# EAGLE board steering_wheel_V2 (EAGLE 6.3)
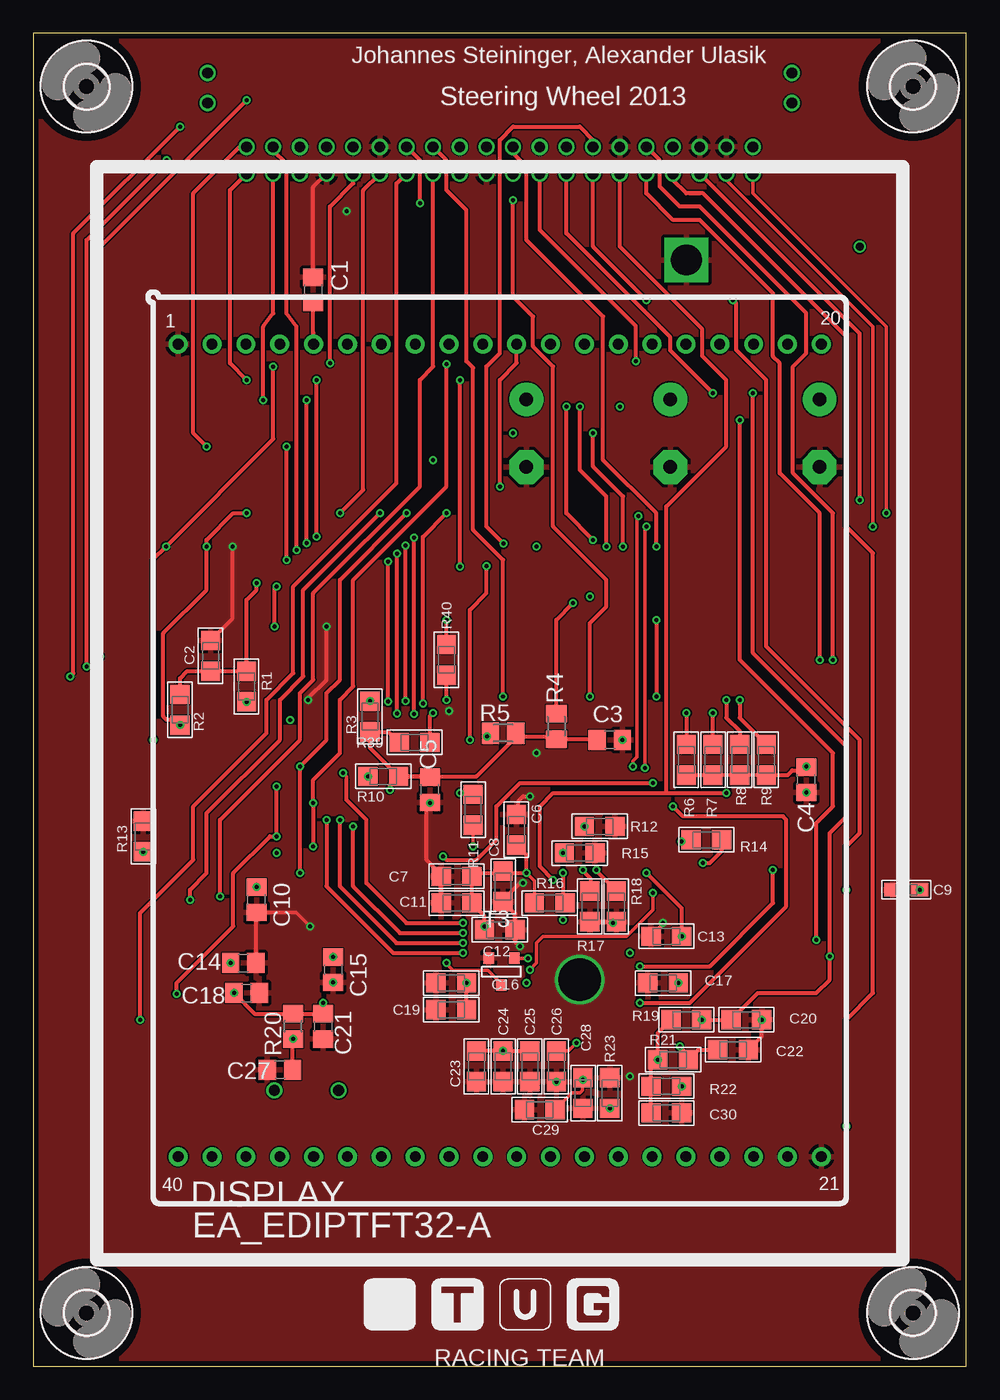
[diagram p0: board, top side]
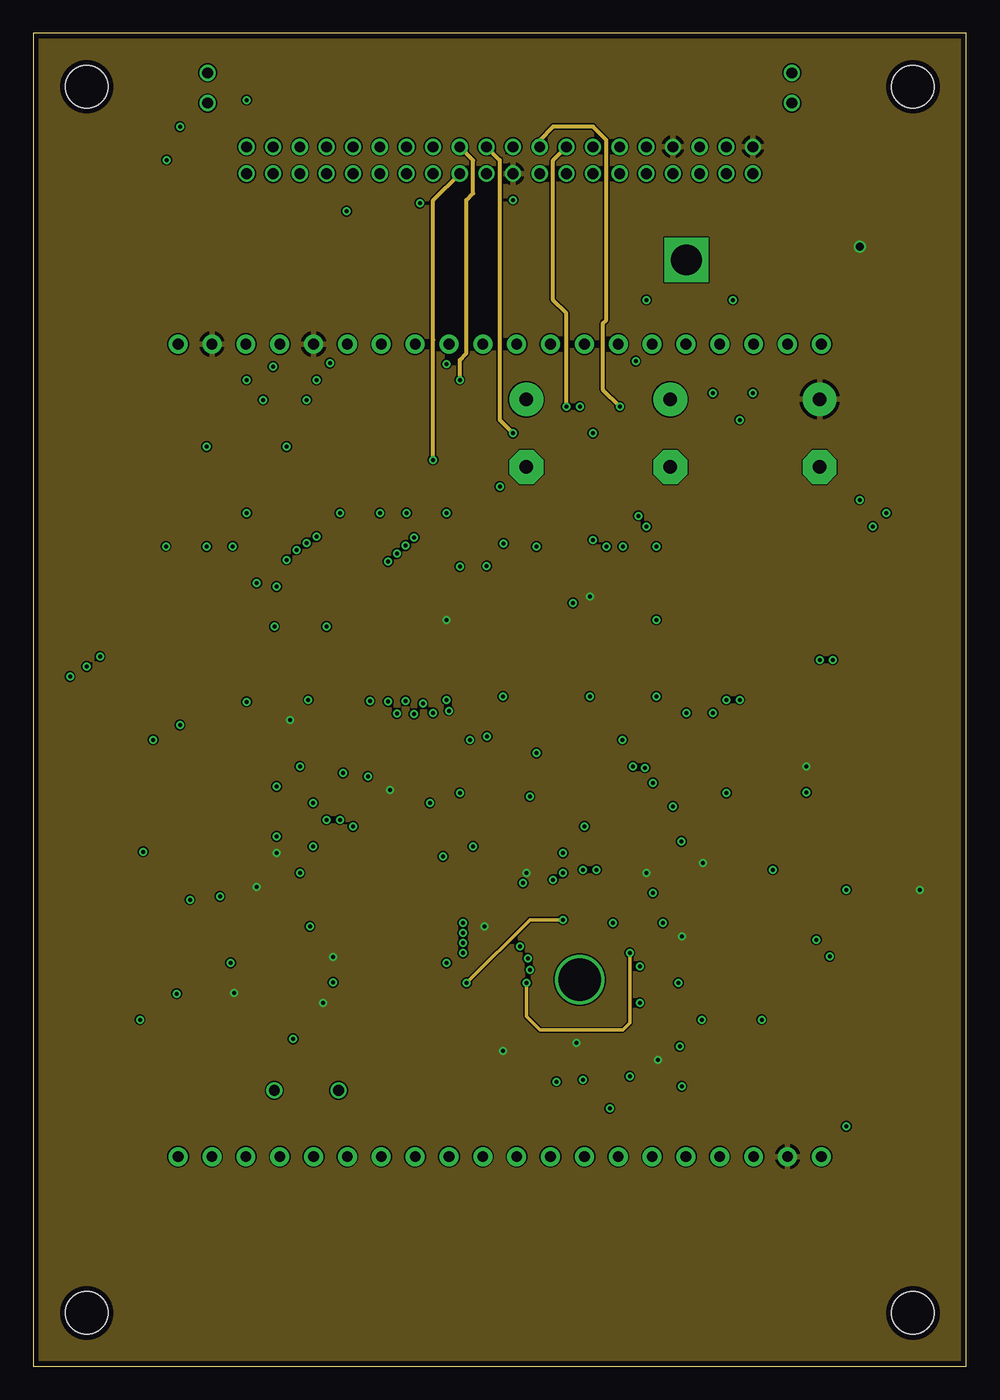
[diagram p1: board, inner layer Route2]
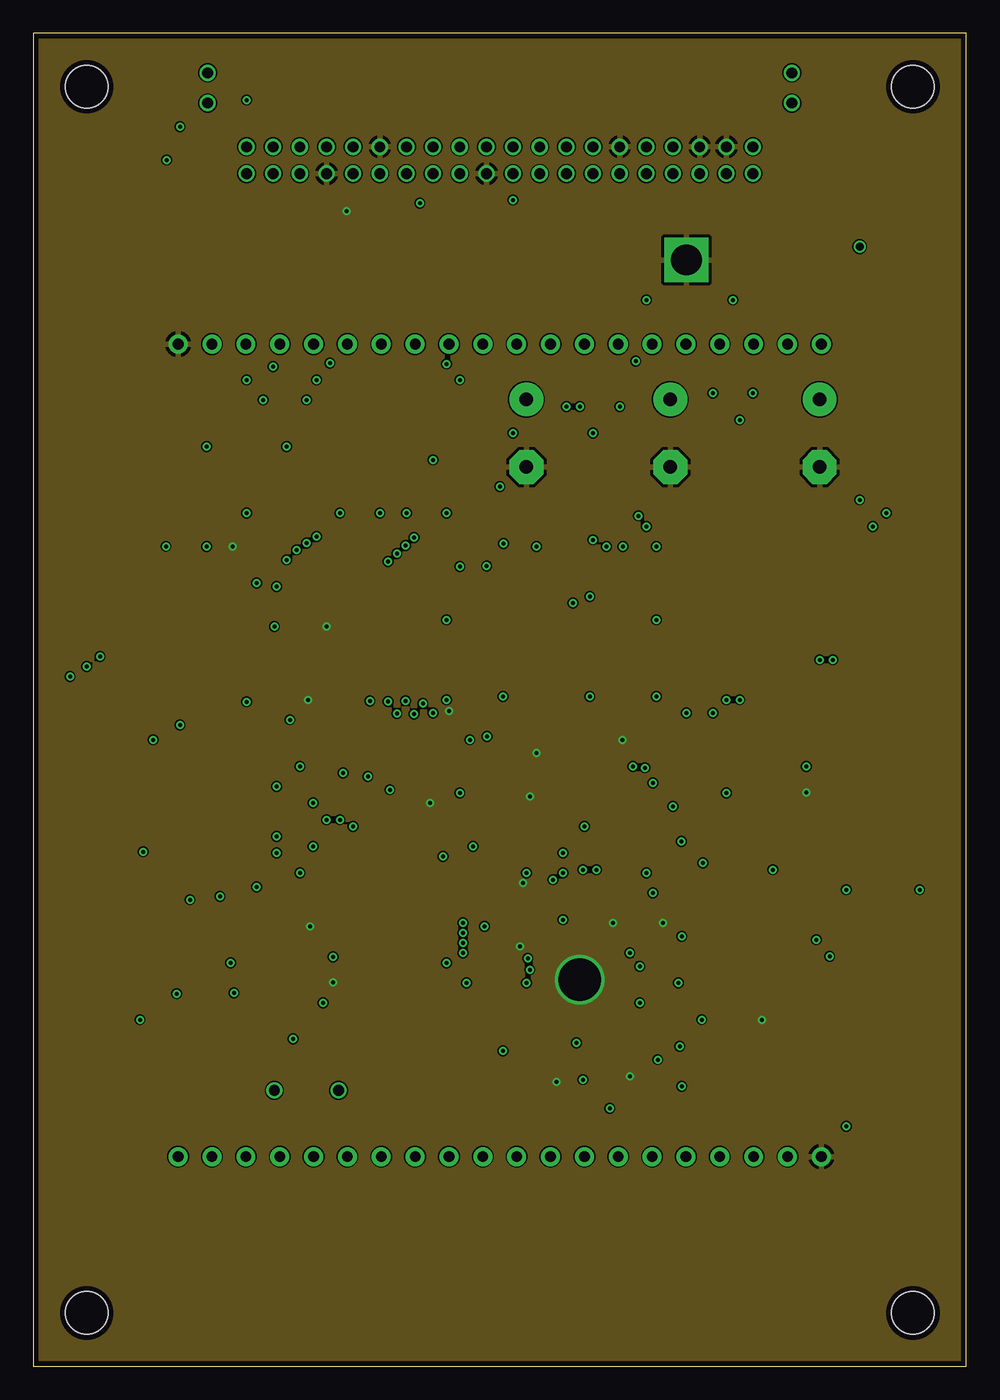
[diagram p2: board, inner layer Route3]
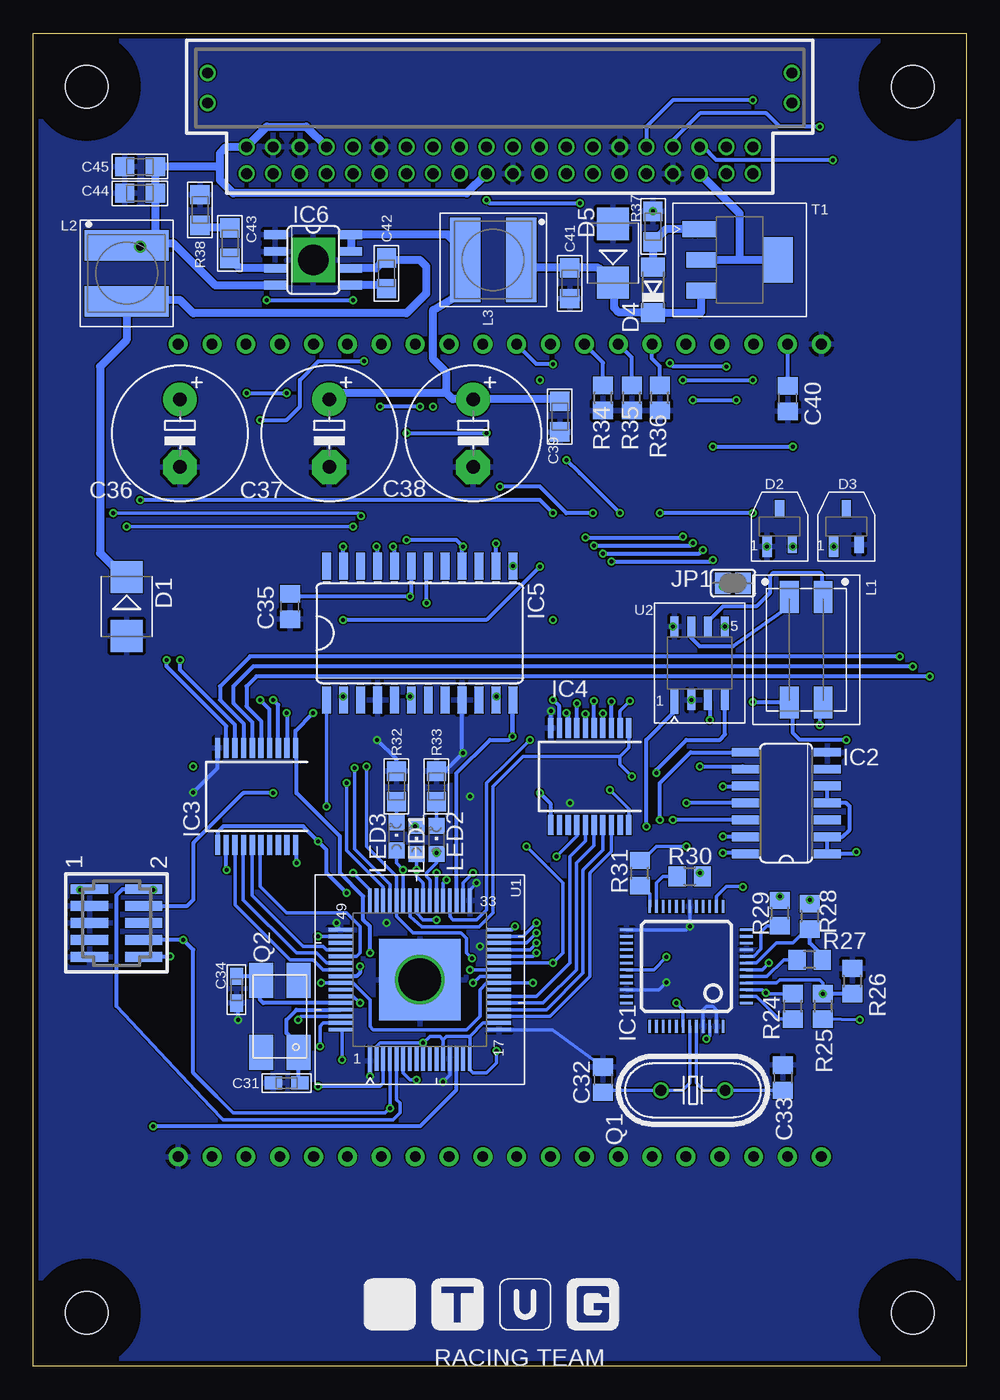
[diagram p3: board, bottom side, seen from below]

Size 70 x 100 mm. Coordinates in mm from the lower left corner, seen from the top.
Outline: 0,0 70,0 70,100 0,100 0,0
Copper layers (1+2*3+16): Top 0.035mm / dielectric 0.1mm / Route2 0.035mm / dielectric 1.5mm / Route3 0.035mm / dielectric 0.1mm / Bottom 0.035mm
Design rules "tugracing *": minimum track width 10mil, minimum drill 0.2mm, track to track 4mil, track to pad 4mil, pad to pad 4mil, via to via 4mil, smd to smd 0.2mm, copper to edge 0.4mm, drill to drill 0.1mm, minimum pad ring 0.15mm, minimum via ring 0.15mm, stop-mask expansion 0.1mm, vias tented up to drill 0.61mm, thermal gap 0.25mm

## Footprints (pad centres in the part's own frame; a part is rotated, then mirrored left to right if it is on the bottom)
C0805 = smd 1.3 x 1.5: 1 -0.95,0; 2 0.95,0
2012M_0805 = smd 1.45 x 1.43: 1 -1.15,0; 2 1.15,0
1608M_0603 = smd 1.3 x 0.99: 1 -1,0; 2 1,0
E5-10,5 = drill 1.016 pad 2.54: + -2.54,0 | drill 1.016 pad 2.54 octagon: - 2.54,0
FTSH-105-01-XXX-DV-K = smd 0.737 x 2.794: 1 -2.54,-2.032; 2 -2.54,2.032; 3 -1.27,-2.032; 4 -1.27,2.032; 5 0,-2.032; 6 0,2.032; 7 1.27,-2.032; 8 1.27,2.032; 9 2.54,-2.032; 10 2.54,2.032
SMB = smd 2.4 x 2.4: A 2.2,0; C -2.2,0
SOT23-3 = smd 0.7 x 1.6: 1 0.95,1.488 | smd 0.7 x 1.3: 2 -0.95,1.337; 3 0,-1.337
SOD80C = smd 1.4 x 1.8: A 1.7,0; C -1.7,0
EDIPTFT32-A = drill 0.8 pad 1.422: P$1 -24.13,30.48; P$2 -21.59,30.48; P$3 -19.05,30.48; P$4 -16.51,30.48; P$5 -13.97,30.48; P$6 -11.43,30.48; P$7 -8.89,30.48; P$8 -6.35,30.48; P$9 -3.81,30.48; P$10 -1.27,30.48; P$11 1.27,30.48; P$12 3.81,30.48; P$13 6.35,30.48; P$14 8.89,30.48; P$15 11.43,30.48; P$16 13.97,30.48; P$17 16.51,30.48; P$18 19.05,30.48; P$19 21.59,30.48; P$20 24.13,30.48; P$21 24.13,-30.48; P$22 21.59,-30.48; P$23 19.05,-30.48; P$24 16.51,-30.48; P$25 13.97,-30.48; P$26 11.43,-30.48; P$27 8.89,-30.48; P$28 6.35,-30.48; P$29 3.81,-30.48; P$30 1.27,-30.48; P$31 -1.27,-30.48; P$32 -3.81,-30.48; P$33 -6.35,-30.48; P$34 -8.89,-30.48; P$35 -11.43,-30.48; P$36 -13.97,-30.48; P$37 -16.51,-30.48; P$38 -19.05,-30.48; P$39 -21.59,-30.48; P$40 -24.13,-30.48
3,2 = hole 3.2: 0,0
LQFP48 = smd 0.2 x 1: 1 -2.75,-4.5; 2 -2.25,-4.5; 3 -1.75,-4.5; 4 -1.25,-4.5; 5 -0.75,-4.5; 6 -0.25,-4.5; 7 0.25,-4.5; 8 0.75,-4.5; 9 1.25,-4.5; 10 1.75,-4.5; 11 2.25,-4.5; 12 2.75,-4.5; 25 2.75,4.5; 26 2.25,4.5; 27 1.75,4.5; 28 1.25,4.5; 29 0.75,4.5; 30 0.25,4.5; 31 -0.25,4.5; 32 -0.75,4.5; 33 -1.25,4.5; 34 -1.75,4.5; 35 -2.25,4.5; 36 -2.75,4.5 | smd 1 x 0.2: 13 4.5,-2.75; 14 4.5,-2.25; 15 4.5,-1.75; 16 4.5,-1.25; 17 4.5,-0.75; 18 4.5,-0.25; 19 4.5,0.25; 20 4.5,0.75; 21 4.5,1.25; 22 4.5,1.75; 23 4.5,2.25; 24 4.5,2.75; 37 -4.5,2.75; 38 -4.5,2.25; 39 -4.5,1.75; 40 -4.5,1.25; 41 -4.5,0.75; 42 -4.5,0.25; 43 -4.5,-0.25; 44 -4.5,-0.75; 45 -4.5,-1.25; 46 -4.5,-1.75; 47 -4.5,-2.25; 48 -4.5,-2.75
SO14 = smd 0.66 x 2.032: 1 -3.81,-3.073; 2 -2.54,-3.073; 3 -1.27,-3.073; 4 0,-3.073; 5 1.27,-3.073; 6 2.54,-3.073; 7 3.81,-3.073; 8 3.81,3.073; 9 2.54,3.073; 10 1.27,3.073; 11 0,3.073; 12 -1.27,3.073; 13 -2.54,3.073; 14 -3.81,3.073
SSOP20 = smd 0.4 x 1.5: 1 -2.925,-3.625; 2 -2.275,-3.625; 3 -1.625,-3.625; 4 -0.975,-3.625; 5 -0.325,-3.625; 6 0.325,-3.625; 7 0.975,-3.625; 8 1.625,-3.625; 9 2.275,-3.625; 10 2.925,-3.625; 11 2.925,3.625; 12 2.275,3.625; 13 1.625,3.625; 14 0.975,3.625; 15 0.325,3.625; 16 -0.325,3.625; 17 -0.975,3.625; 18 -1.625,3.625; 19 -2.275,3.625; 20 -2.925,3.625
SO_W24 = smd 0.66 x 2.032: 1 -6.985,-5.029; 2 -5.715,-5.029; 3 -4.445,-5.029; 4 -3.175,-5.029; 5 -1.905,-5.029; 6 -0.635,-5.029; 7 0.635,-5.029; 8 1.905,-5.029; 9 3.175,-5.029; 10 4.445,-5.029; 11 5.715,-5.029; 12 6.985,-5.029; 13 6.985,5.029; 14 5.715,5.029; 15 4.445,5.029; 16 3.175,5.029; 17 1.905,5.029; 18 0.635,5.029; 19 -0.635,5.029; 20 -1.905,5.029; 21 -3.175,5.029; 22 -4.445,5.029; 23 -5.715,5.029; 24 -6.985,5.029
SOIC08-II = smd 0.66 x 1.651: 1 -1.905,-2.854; 2 -0.635,-2.854; 3 0.635,-2.854; 4 1.905,-2.854; 5 1.905,2.854; 6 0.635,2.854; 7 -0.635,2.854; 8 -1.905,2.854 | drill 2.3 pad 2.8 square: HS 0,0
T2M-120-01-L-D-RA-WT = drill 0.813: 1 -19,-3.52; 2 -19,-1.52; 3 -17,-3.52; 4 -17,-1.52; 5 -15,-3.52; 6 -15,-1.52; 7 -13,-3.52; 8 -13,-1.52; 9 -11,-3.52; 10 -11,-1.52; 11 -9,-3.52; 12 -9,-1.52; 13 -7,-3.52; 14 -7,-1.52; 15 -5,-3.52; 16 -5,-1.52; 17 -3,-3.52; 18 -3,-1.52; 19 -1,-3.52; 20 -1,-1.52; 21 1,-3.52; 22 1,-1.52; 23 3,-3.52; 24 3,-1.52; 25 5,-3.52; 26 5,-1.52; 27 7,-3.52; 28 7,-1.52; 29 9,-3.52; 30 9,-1.52; 31 11,-3.52; 32 11,-1.52; 33 13,-3.52; 34 13,-1.52; 35 15,-3.52; 36 15,-1.52; 37 17,-3.52; 38 17,-1.52; 39 19,-3.52; 40 19,-1.52; 100 21.927,1.77; 101 21.927,4.03; 102 -21.927,4.03; 103 -21.927,1.77
SJ = smd 1.168 x 1.6: 1 -0.762,0; 2 0.762,0
WE-SL2 = smd 2.4 x 1.4: 1 -3.95,1.27; 2 3.95,1.27; 3 3.95,-1.27; 4 -3.95,-1.27
WE-TPC_LH = smd 6.3 x 2.3: 1 0,2.1; 2 0,-2.1
CHIPLED_0805 = smd 1.2 x 1.2: A 0,-1.05; C 0,1.05
HC49U70 = drill 0.813: 1 -2.413,0; 2 2.413,0
ABMM2 = smd 2.6 x 1.8: 1 -2.7,-1.4; 2 2.7,-1.4; 3 2.7,1.4; 4 -2.7,1.4
M0805 = smd 1.3 x 1.6: 1 -0.95,0; 2 0.95,0
R0805 = smd 1.3 x 1.5: 1 -0.95,0; 2 0.95,0
SOT223-3 = smd 1.2 x 2.5: 1 2.3,3.05 | smd 1.2 x 2.2: 2 0,2.9; 3 -2.3,2.9 | smd 3.4 x 2.2: TAB 0,-2.9
SOT-23 = smd 0.787 x 0.889: 1 0.025,-1.016; 2 -0.94,1.016; 3 0.991,1.016
PG-LQFP-64-6 = smd 0.29 x 2.1: 1 3.75,6.1 | smd 0.29 x 1.8: 2 3.25,5.95; 3 2.75,5.95; 4 2.25,5.95; 5 1.75,5.95; 6 1.25,5.95; 7 0.75,5.95; 8 0.25,5.95; 9 -0.25,5.95; 10 -0.75,5.95; 11 -1.25,5.95; 12 -1.75,5.95; 13 -2.25,5.95; 14 -2.75,5.95; 15 -3.25,5.95; 16 -3.75,5.95; 33 -3.75,-5.95; 34 -3.25,-5.95; 35 -2.75,-5.95; 36 -2.25,-5.95; 37 -1.75,-5.95; 38 -1.25,-5.95; 39 -0.75,-5.95; 40 -0.25,-5.95; 41 0.25,-5.95; 42 0.75,-5.95; 43 1.25,-5.95; 44 1.75,-5.95; 45 2.25,-5.95; 46 2.75,-5.95; 47 3.25,-5.95; 48 3.75,-5.95 | smd 1.8 x 0.29: 17 -5.95,3.75; 18 -5.95,3.25; 19 -5.95,2.75; 20 -5.95,2.25; 21 -5.95,1.75; 22 -5.95,1.25; 23 -5.95,0.75; 24 -5.95,0.25; 25 -5.95,-0.25; 26 -5.95,-0.75; 27 -5.95,-1.25; 28 -5.95,-1.75; 29 -5.95,-2.25; 30 -5.95,-2.75; 31 -5.95,-3.25; 32 -5.95,-3.75; 49 5.95,-3.75; 50 5.95,-3.25; 51 5.95,-2.75; 52 5.95,-2.25; 53 5.95,-1.75; 54 5.95,-1.25; 55 5.95,-0.75; 56 5.95,-0.25; 57 5.95,0.25; 58 5.95,0.75; 59 5.95,1.25; 60 5.95,1.75; 61 5.95,2.25; 62 5.95,2.75; 63 5.95,3.25; 64 5.95,3.75 | smd 6.1 x 6.1: PAD 0,0
SO8 = smd 0.6 x 1.8: 1 1.905,2.9 | smd 0.6 x 1.5: 2 0.635,2.75; 3 -0.635,2.75; 4 -1.905,2.75; 5 -1.905,-2.75; 6 -0.635,-2.75; 7 0.635,-2.75; 8 1.905,-2.75

## Placement (x,y rotation side)
C1  100n  [C0805]  21,80.75 90 top
C2  10n  [2012M_0805]  13.3,53.3 90 top
C3  100n  [C0805]  43.25,47 0 top
C4  100n  [C0805]  58,44 90 top
C5  100n  [C0805]  29.75,43.25 90 top
C6  100n  [2012M_0805]  36.25,40.25 270 top
C7  100n  [2012M_0805]  31.75,36.75 0 top
C8  100n  [2012M_0805]  35.25,36 90 top
C9  100n  [1608M_0603]  65.5,35.75 0 top
C10  100n  [C0805]  16.75,35 270 top
C11  100n  [2012M_0805]  31.75,34.75 180 top
C12  100n  [2012M_0805]  35,32.75 180 top
C13  100n  [2012M_0805]  47.5,32.25 0 top
C14  33n  [C0805]  15.75,30.25 180 top
C15  100n  [C0805]  22.5,29.75 270 top
C16  470n  [2012M_0805]  31.35,28.75 180 top
C17  470n  [2012M_0805]  47.25,28.75 180 top
C18  100n  [C0805]  16,28 0 top
C19  470n  [2012M_0805]  31.35,26.75 180 top
C20  100n  [2012M_0805]  53.5,26 180 top
C21  100n  [C0805]  21.75,25.5 270 top
C22  100n  [2012M_0805]  52.5,23.75 180 top
C23  220n  [2012M_0805]  33.25,22.5 90 top
C24  100n  [2012M_0805]  35.25,22.5 90 top
C25  10n  [2012M_0805]  37.25,22.5 90 top
C26  100n  [2012M_0805]  39.25,22.5 90 top
C27  100n  [C0805]  18.5,22.25 0 top
C28  1u  [2012M_0805]  41.25,20.5 270 top
C29  1u  [2012M_0805]  38,19.25 180 top
C30  100n  [2012M_0805]  47.5,19 180 top
C31  33p  [1608M_0603]  51,21.25 180 bottom
C32  68p  [C0805]  27.25,21.5 270 bottom
C33  68p  [C0805]  13.75,21.65 270 bottom
C34  33p  [1608M_0603]  54.75,28.25 270 bottom
C35  1u  [C0805]  50.75,57 270 bottom
C36  100u  [E5-10,5]  59,70 270 bottom
C37  50u  [E5-10,5]  47.8,70 270 bottom
C38  50u  [E5-10,5]  37,70 270 bottom
C39  100n  [2012M_0805]  30.5,71.25 90 bottom
C40  1u  [C0805]  13.4,72.6 270 bottom
C41  100n  [2012M_0805]  29.75,81.25 90 bottom
C42  220n  [2012M_0805]  43.5,82 90 bottom
C43  22n  [2012M_0805]  55.25,84.25 270 bottom
C44  220n  [2012M_0805]  62,88 0 bottom
C45  10n  [2012M_0805]  62,90 0 bottom
CON1  SAMTEC_DAP  [FTSH-105-01-XXX-DV-K]  63.75,33.25 270 bottom
D1  MBRS130LT3  [SMB]  63,57 270 bottom
D2  ESD24VS2U  [SOT23-3]  14,63 180 bottom
D3  ESD24VS2U  [SOT23-3]  9,63 180 bottom
D4  BZV55/C13  [SOD80C]  23.5,80.75 90 bottom
D5  1SMB30AT3  [SMB]  26.5,83.5 90 bottom
DISPLAY  EA_EDIPTFT32-A  [EDIPTFT32-A]  35,46.2 0 top
FRAME1  A4L-LOC-RACING-NOLOGO  [NOLOGO]  -24,102 0 top  (outside the outline)
FRAME2  A4L-LOC-RACING-NOLOGO  [NOLOGO]  -24,110 0 top  (outside the outline)
FRAME3  A4L-LOC-RACING-NOLOGO  [NOLOGO]  -46,110 0 top  (outside the outline)
FRAME4  A4L-LOC-RACING-BRD-TPLACE  [LOGO_RACING_BRD_TPLACE]  35,4 0 top
FRAME5  A4L-LOC-RACING-NOLOGO  [NOLOGO]  6,21 0 top
FRAME6  A4L-LOC-RACING-BRD-TPLACE  [LOGO_RACING_BRD_TPLACE]  35,4 0 bottom
H1  MOUNT-HOLE3.2  [3,2]  4,96 90 top
H2  MOUNT-HOLE3.2  [3,2]  66,96 90 top
H3  MOUNT-HOLE3.2  [3,2]  4,4 90 top
H4  MOUNT-HOLE3.2  [3,2]  66,4 90 top
IC1  FT2232  [LQFP48]  21,30 90 bottom
IC2  74AC125D  [SO14]  13.5,42.25 90 bottom
IC3  MAX6818  [SSOP20]  53.25,42.75 180 bottom
IC4  MAX6818  [SSOP20]  28.25,44.25 180 bottom
IC5  MAX7221  [SO_W24]  41,55 0 bottom
IC6  TLE8366E V50  [SOIC08-II]  49,83 270 bottom
J1  T2M-120-01-L-D-RA-WT  [T2M-120-01-L-D-RA-WT]  35,93 0 bottom
JP1  [SJ]  17.5,58.75 0 bottom
L1  CM_51U1A  [WE-SL2]  12,53.75 270 bottom
L2  L47UH_0.82A_744053470_WE-TPC_LH  [WE-TPC_LH]  63,82 0 bottom
L3  L47UH_0.82A_744053470_WE-TPC_LH  [WE-TPC_LH]  35.5,83 270 bottom
LED1  [CHIPLED_0805]  41.25,39.5 0 bottom
LED2  [CHIPLED_0805]  39.75,39.5 0 bottom
LED3  [CHIPLED_0805]  42.75,39.75 0 bottom
Q1  6MHz  [HC49U70]  20.5,20.7 180 bottom
Q2  8Mhz  [ABMM2]  51.5,26.25 90 bottom
R1  1k5  [2012M_0805]  16,51 90 top
R2  1k5  [2012M_0805]  11,49.25 90 top
R3  10k  [2012M_0805]  25.25,48.75 270 top
R4  10K  [M0805]  39.25,48 90 top
R5  20k  [M0805]  35.25,47.5 0 top
R6  10k  [2012M_0805]  49,45.5 90 top
R7  10k  [2012M_0805]  51,45.5 90 top
R8  10k  [2012M_0805]  53,45.5 270 top
R9  10k  [2012M_0805]  55,45.5 270 top
R10  10k  [2012M_0805]  26.25,44.25 180 top
R11  10k  [2012M_0805]  33,41.75 270 top
R12  470  [2012M_0805]  42.5,40.5 0 top
R13  10k  [2012M_0805]  8.25,39.75 90 top
R14  10k  [2012M_0805]  50.5,39.5 180 top
R15  10k  [2012M_0805]  41,38.5 180 top
R16  10k  [2012M_0805]  38.75,34.75 0 top
R17  10k  [2012M_0805]  41.75,34.5 90 top
R18  10k  [2012M_0805]  43.75,34.5 90 top
R19  10k  [2012M_0805]  49,26 180 top
R20  470R  [R0805]  19.5,25.5 90 top
R21  10k  [2012M_0805]  48,23 180 top
R22  10k  [2012M_0805]  47.5,21 180 top
R23  10k  [2012M_0805]  43.25,20.5 90 top
R24  10k  [R0805]  13,27 90 bottom
R25  2k7  [R0805]  10.75,27 270 bottom
R26  10k  [R0805]  8.55,28.9 270 bottom
R27  1k5  [R0805]  11.75,30.5 180 bottom
R28  27R  [R0805]  11.75,33.75 270 bottom
R29  27R  [R0805]  14,34 270 bottom
R30  270  [R0805]  20.75,36.75 0 bottom
R31  270  [R0805]  24.5,37 90 bottom
R32  2k2  [2012M_0805]  42.75,43.5 90 bottom
R33  470  [2012M_0805]  39.75,43.5 90 bottom
R34  X(10k)  [R0805]  27.25,72.65 90 bottom
R35  X(10k)  [R0805]  25.1,72.65 90 bottom
R36  X(10k)  [R0805]  23,72.65 90 bottom
R37  10k  [2012M_0805]  23.5,85.5 270 bottom
R38  22k  [2012M_0805]  57.5,86.75 270 bottom
R39  10k  [2012M_0805]  28.6,46.8 180 top
R40  10k  [2012M_0805]  31,53 90 top
T1  BSP613P  [SOT223-3]  17,83 90 bottom
T3  [SOT-23]  35.1,29.6 0 top
U1  SAK-XC2336B-40F80L  [PG-LQFP-64-6]  41,29 180 bottom
U2  TLE6251DS  [SO8]  20,52.75 180 bottom

## Library data of the parts
C1 C3-C5 C10 C14 C15 C18 C21 C27 C32 C33 C35-C38 C40 R4 R5 R20 R24-R31 R34-R36 = rcl
C2 C6-C9 C11-C13 C16 C17 C19 C20 C22-C26 C28-C31 C34 C39 C41-C45 = C
CON1 = Samtec_E_Racing
D1 D4 = diode
D2 D3 = D
D5 = 1Adiode
DISPLAY IC5 = _TUG Racing Team_
FRAME1 = frames; FRAME_EMAIL: alexander.ulasik@racing.tugraz.at; FRAME_SUBTITLE: PROCESSOR XC2236N; FRAME_TITLE: steering wheel; FRAME_USER: Alexander Ulasik, Johannes Steininger
FRAME2 = frames; FRAME_EMAIL: alexander.ulasik@racing.tugraz.at; FRAME_SUBTITLE: BUTTON/ENC. INTERFACE; FRAME_TITLE: steering wheel; FRAME_USER: Alexander Ulasik, Johannes Steininger
FRAME3 = frames; FRAME_EMAIL: alexander.ulasik@racing.tugraz.at; FRAME_SUBTITLE: DISPLAY/QUICK RELEASE; FRAME_SUBTITLE_SUB: QUICK RELEASE; FRAME_TITLE: steering wheel; FRAME_USER: Alexander Ulasik, Johannes Steininger
FRAME4 = frames; FRAME_EMAIL: alexander.ulasik@racing.tugraz.at; FRAME_SUBTITLE: BUCK CONVERTER; FRAME_TITLE: steering wheel; FRAME_USER: Alexander Ulasik, Johannes Steininger
FRAME5 = frames; FRAME_EMAIL: alexander.ulasik@racing.tugraz.at; FRAME_SUBTITLE: LED Controller; FRAME_SUBTITLE_SUB: LED Controller; FRAME_TITLE: steering wheel; FRAME_USER: Alexander Ulasik, Johannes Steininger
FRAME6 = frames; FRAME_EMAIL: alexander.ulasik@racing.tugraz.at; FRAME_SUBTITLE: USB/CAN INTERFACE; FRAME_TITLE: steering wheel; FRAME_USER: Alexander Ulasik, Johannes Steininger
H1-H4 = holes
IC1 = ftdichip
IC2 = 74xx-eu
IC3 IC4 = misto
IC6 = infineon
J1 = J
JP1 = jumper
L1-L3 = L
LED1-LED3 = led; ASMT-RA45-AQ502: amber; ASMT-RF45-AQ502: green; ASMT-RJ45-AQ502: orange; ASMT-RR45-AQ502: red
Q1 = crystal
Q2 = oszillator
R1-R3 R6-R19 R21-R23 R32 R33 R37-R40 = R
T1 = T
T3 = zetex; OC_FARNELL: unknown; OC_NEWARK: unknown
U1 U2 = U

## Nets
!PORST: C20.2 CON1.10 J1.15 R19.1 U1.62
!TRST: CON1.8 J1.17 R23.1 U1.4
!U0C1_SEL0: IC5.12 R5.1 U1.35
+5V/1#: C1.1 C3.1 C4.2 C5.2 C6.2 C7.2 C8.2 C9.2 C10.1 C11.1 C12.2 C13.2 C15.1 C18.1 C21.1 C23.2 C24.2 C25.2 C26.2 C30.2 C35.1 C36.+ C40.1 C44.2 C45.2 CON1.1 DISPLAY.P$2 DISPLAY.P$5 DISPLAY.P$22 IC1.3 IC1.14 IC1.31 IC1.42 IC2.14 IC3.20 IC4.20 IC5.19 IC6.4 J1.2 J1.8 J1.19 L2.1 R3.2 R4.1 R5.2 R6.1 R7.1 R8.2 R9.2 R10.1 R14.1 R16.1 R19.2 R20.2 R21.2 R22.2 R24.2 R39.2 R40.2 U1.2 U1.9 U1.12 U1.16 U1.18 U1.32 U1.34 U1.48 U1.50 U1.64 U2.3
BUT_MIN: IC3.16 U1.53
BUT_PLUS: IC3.12 U1.56
BUT_TL: IC3.14 U1.54
BUTTON_PUSHED_1: IC3.11 R14.2 U1.26
BUTTON_PUSHED_2: R11.2 T3.1 U1.27
CAN0_HIGH: D3.1 J1.31 L1.3 R1.1
CAN0_LOW: D2.2 J1.29 L1.2 R2.1
CAN0_RXD: U1.31 U2.4
CAN0_TXD: U1.30 U2.1
DAP0: CON1.4 J1.11 U1.37
DAP1: CON1.2 J1.13 U1.5
DD_5: IC4.14 U1.46
DD_PIN3: J1.1 T3.3 U1.44
DD_PIN4: J1.3 U1.45
DD_PIN5: IC4.7 J1.5
DIG0: IC5.2 J1.24
DIG1: IC5.11 J1.26
DIG2: IC5.6 J1.28
EEDATA: IC1.2 R24.1
EN_PB_1: IC3.1 R6.2 U1.25
EN_PB_2: IC4.1 R10.2 U1.42
ENC_1: IC4.18 U1.19
ENC_2: IC4.17 U1.20
ENC_4: IC4.16 U1.21
ENC_8: IC4.15 U1.22
ENCODER_1: IC4.3 J1.40
ENCODER_2: IC4.4 J1.38
ENCODER_4: IC4.5 J1.37
ENCODER_8: IC4.6 J1.39
GND: C1.2 C2.2 C3.2 C4.1 C5.1 C6.1 C7.1 C8.1 C9.1 C10.2 C11.2 C12.1 C13.1 C14.1 C15.2 C16.2 C17.2 C18.2 C19.2 C20.1 C21.2 C22.1 C23.1 C24.1 C25.1 C26.1 C27.1 C28.2 C29.2 C30.1 C31.2 C32.1 C33.1 C34.2 C35.2 C36.- C37.- C38.- C39.1 C40.2 C41.1 C44.1 C45.1 CON1.3 CON1.5 CON1.9 D1.A D2.1 D3.2 D5.A DISPLAY.P$1 DISPLAY.P$21 IC1.9 IC1.18 IC1.25 IC1.34 IC1.45 IC1.47 IC2.7 IC3.10 IC4.10 IC5.4 IC5.9 IC6.1 IC6.2 IC6.HS J1.4 J1.6 J1.12 J1.21 J1.30 J1.33 R12.2 R13.2 R15.1 R17.1 R18.1 R23.2 R26.1 R32.2 R33.2 R34.1 R35.1 R36.1 R37.1 R38.1 T3.2 U1.1 U1.13 U1.17 U1.33 U1.49 U1.PAD U2.2 U2.8
LVPD_SUP: J1.35 T1.2 T1.TAB
MINUS: IC3.5 J1.34
N$1: C31.1 Q2.1 U1.61
N$2: C34.1 Q2.3 U1.60
N$3: C14.2 IC1.6
N$4: R22.1 U1.3
N$5: IC4.8 R39.1
N$6: C16.1 C17.1 C19.1 U1.24 U1.41 U1.57
N$7: C22.2 R21.1 U1.63
N$8: DISPLAY.P$8 R34.2
N$9: C28.1 C29.1 U1.6
N$10: DISPLAY.P$7 R35.2
N$11: IC1.8 R29.2
N$12: IC1.7 R27.1 R28.2
N$13: DISPLAY.P$6 R36.2
N$14: IC1.5 R27.2
N$15: C27.2 IC1.46 R20.1
N$16: L1.4 U2.7
N$17: L1.1 U2.6
N$18: IC1.24 R31.1
N$19: IC1.23 R30.1
N$20: C32.2 IC1.43 Q1.2
N$21: C33.2 IC1.44 Q1.1
N$22: JP1.1 U2.5
N$23: C37.+ C38.+ C39.2 IC6.7 IC6.8 L3.2
N$24: LED1.C R12.1
N$25: IC5.18 R4.2
N$26: LED2.C R33.1
N$27: LED3.A R18.2 U1.43
N$28: IC2.1 IC2.2 IC2.4 IC2.5 R13.1
N$29: IC4.2 R3.1
N$30: C43.1 R38.2
N$31: IC4.9 R40.1
N$32: LED3.C R32.1
N$33: IC3.2 R7.2
N$34: D4.A R37.2 T1.1
N$35: IC4.11 R11.1
N$36: C43.2 IC6.3
N$37: C42.2 D1.C IC6.6 L2.2
N$38: C42.1 IC6.5
N$39: C2.1 JP1.2 R1.2 R2.2
N$45: IC3.3 R8.1
N$46: IC3.4 R9.1
PLUS: IC3.9 J1.10
POTI_1: J1.7 U1.14
RXD_DISP: DISPLAY.P$10 IC2.11 R31.2
SEG_A: IC5.14 J1.14
SEG_B: IC5.16 J1.16
SEG_C: IC5.20 J1.18
SEG_D: IC5.23 J1.20
SEG_E: IC5.21 J1.22
SH_DN: IC3.15 U1.52
SH_UP: IC3.13 U1.55
SHIFT_DOWN: IC3.6 J1.36
SHIFT_UP: IC3.8 J1.9
STATUS_0: R16.2 U1.38
STATUS_1: LED2.A R15.2 U1.39
STATUS_2: LED1.A R17.2 U1.40
SUP6.1: C41.2 D4.C D5.C L3.1 T1.3
TOP_LEFT: IC3.7 J1.32
TXD_DISP: DISPLAY.P$11 IC2.9 R30.2
U0C0_RXD: IC2.8 U1.29
U0C0_TXD: IC2.12 U1.28
U0C1_CLK: IC5.13 U1.36
U0C1_TXD: IC5.1 U1.59
USB_2: J1.25 R29.1
USB_3: J1.23 R28.1
USB_PWR: IC1.4 IC2.10 IC2.13 R25.1 R26.2
USB_VDD: J1.27 R25.2

## Tracks (layer width: path | path; a pad name or v marks a point on that pad's centre or on a via)
!PORST  (via drill 0.3)
  Top 0.305: v54,73 54,53.5 61,46.5 61,41.25 59.75,40 v59.75,30.75 59.75,29 58.75,28 54.35,28 C20.2 R19.1 | 40.02,89.48 J1.15 40,85 47.8,77.2 47.8,76.2 50,74 v51,73
  Bottom 0.254: U1.62 49.9,26.25 R19.1
  Bottom 0.305: CON1.10 59.79,30.71 v59.75,30.75 | v54,73 v51,73
  other vias: 50.15,26
!TRST  (via drill 0.3)
  Top 0.254: R23.1 43.6,19
  Top 0.305: v58.75,32 58.75,40.75 60,42 60,46 53,53 v53,71 | J1.17 38,85.25 45.2,78.05 45.2,76 v45.2,75.4
  Bottom 0.254: U1.4 R23.1 43.6,19 55,19 56.25,20.25
  Bottom 0.305: v53,71 51,71 50,72 50,74 48.6,75.4 v45.2,75.4 | CON1.8 61.7,32 v58.75,32 58,31.25 58,22 56.25,20.25
  other vias: 43.25,19.35
!U0C1_SEL0  (via drill 0.3)
  Top 0.305: v34.05,47.25 R5.1
  Bottom 0.305: 34.02,49 34.02,47.28 v34.05,47.25 | 34.02,49 IC5.12 | v34.05,47.25 34.05,48.97 34.02,49 | U1.35 38.25,44.5 35.75,47 34.3,47 v34.05,47.25
+5V/1#  (via drill 0.3, 0.6)
  Top 0.254: C24.2 35.25,23.75 35,24 | C23.2 33.6,24 | C18.1 15.05,28.2 14.75,28.5 | 29.95,44.4 C5.2 29.7,44.25 | 35.35,37 C8.2 35.1,36.75 35.1,36.9 35,37 | 25.25,47 R3.2 | R10.1 26.82,44.83 26.25,45.4 | v33.85,33 33.75,32.85 | 33.4,34.25 C11.1 | C7.2 33.15,37 | R16.1 37.6,36.4 v37,37 | 51.65,39.15 R14.1 | R7.1 R8.2 R9.2 | C4.2 57.6,45.35 | C21.1 v21.75,27.25 | R21.2 46.85,23.15 | R21.2 47.15,23 | 46.35,22.5 R21.2 | C26.2 40.15,23.65 v40.75,24.25
  Top 0.305: C25.2 C24.2 C23.2 | v46,37 48.65,34.35 C13.2 | C1.1 21,77.51 DISPLAY.P$5 | C3.1 42.25,47.05 R4.1 39.05,47.25 36.45,47.25 R5.2 | C21.1 R20.2 16.6,26.45 C18.1 | 29.7,44.25 R10.1 | 33.15,37 35,37 | C11.1 C7.2 | R6.1 R7.1 | v58,45 57.65,45.35 | v40.75,24.25 40.75,24.15 | R5.2 36.2,47.2 | 25.25,47 25.25,46.4 26.82,44.83 | 33.4,34.25 33.85,33.8 v33.85,33 | R5.2 36,47.3 36,47 33.25,44.25 R10.1 | R19.2 46.85,25 R21.2 | 46.35,22.5 R22.2 C30.2 | R9.2 56.6,44.35 56.95,44.7 57.75,44.7 C4.2 | C6.2 37,38.35 v37,37 35.35,37 | 51.65,39.15 51.65,38.65 50.75,37.75 v50.25,37.75 | R3.2 26.65,47.6 R39.2 | v26.75,43.25 26.75,43.6 R10.1 | R40.2 v31,56
  Top 0.406: 33.75,32.85 33.85,32.85 C12.2 | C4.2 v58,45
  Bottom 0.254: U1.18 36.25,25.75 37.25,24.75 | 37.25,24.75 U1.16 37.25,22.25 37,22 36,22 35.25,22.75 C24.2 | 39.25,24.5 39,24.75 37.25,24.75 | 39.25,24.5 U1.12 | 39.25,24.5 39.5,24.75 40.25,24.75 v40.75,24.25 44,24.25 44.25,24 U1.2 | U1.48 44.75,35.75 v46,37 | U1.50 C13.2 | IC1.3 15.3,28.25 C18.1 15,27.95 R24.2 | IC2.14 16.57,38.5 | IC1.14 18.75,35.25 18,36 16.8,36 C10.1 | IC4.20 25.32,41.83 v26.75,43.25 | v37,37 37.75,36.25 U1.34 | 50.25,39.05 IC3.20 | U2.3 19.25,49.88 | v33.85,33 34.1,32.75 U1.32 | IC1.42 21.25,26.75 v21.75,27.25 | IC1.31 23.45,29.75 C15.1 | U1.64 46.85,25.15 R21.2
  Bottom 0.305: C45.2 C44.2 | 60.85,85.15 v62,84 | IC5.19 41.63,57.87 v41.75,57.75 50.55,57.75 C35.1 | 16.57,38.5 v18.25,38.5 | v50.25,37.75 50.25,39.05 | 19.25,49.88 v19.25,48.5 | C9.2 66.25,35.75 66,36 65.57,36 | 65.57,36 65,36 | CON1.1 65.57,36 | v40.75,24.25 U1.9 | C40.1 DISPLAY.P$2
  Bottom 0.61: IC6.4 56.34,81.09 59.5,84.25 61.75,84.25 v62,84 62.1,84.1 L2.1 | 60.85,85.15 C45.2 56,90 | J1.19 37.48,88 55,88 56,89 56,90 | J1.8 49.52,93 52.48,93 J1.2 55.52,91.48 56,91 56,90
  other vias: 35.25,23.65 48.65,32.25 15.05,28 16.75,35.95 22.5,30.7 66.5,35.75 46.85,23
  pour Route2: -5,104 77,104 77,-8 -5,-8
BUT_MIN
  Bottom 0.254: U1.53 45.75,30.75 45.5,31 45.5,33 46.5,34 51,34 53,36 53,39.05 IC3.16
BUT_PLUS  (via drill 0.3)
  Top 0.305: v45.5,30 50.75,30 55.5,34.75 v55.5,37.25
  Bottom 0.254: v55.5,37.25 55.52,37.27
  Bottom 0.305: 55.52,37.27 IC3.12 | U1.56 45.75,29.25 45.5,29.5 v45.5,30
BUT_TL
  Bottom 0.254: IC3.14 54.25,39.1 54.25,35 50.25,31 48.75,31 48,30.25 U1.54
BUTTON_PUSHED_1  (via drill 0.3)
  Top 0.254: v46.5,35.5 46.5,34.25 44.5,32.25 38.25,32.25 37.75,31.75 37.75,30.25 v37.25,29.75 | R14.2 48.75,39.5 v48.62,39.38
  Bottom 0.254: U1.26 v37.25,29.75
  Bottom 0.305: IC3.11 56.17,40.08 55.75,40.5 49.75,40.5 v48.62,39.38 48,38.75 48,37 v46.5,35.5
BUTTON_PUSHED_2  (via drill 0.3)
  Top 0.254: v33,39 R11.2 | T3.1 35.12,28.68 34.1,29.7 31.5,29.7 31,30.2 v31,30.25
  Bottom 0.254: U1.27 v31,30.25 30.25,31 30.25,36.25 v33,39
CAN0_HIGH  (via drill 0.3)
  Top 0.254: R1.1 16.1,49.85 16.5,50.25
  Top 0.305: J1.31 24,88.75 22.25,87 22.25,77 v22.25,75.25 | v18,75 18,69.56 D3.1 9,60.56 v9,47
  Bottom 0.254: 15.95,49.8 R1.1 | 13.25,50.75 13.25,49.82 L1.3
  Bottom 0.305: L1.3 15.95,49.8 | 13.25,50.75 13,50.5 13,47.5 12.5,47 v9,47 | D3.1 9.95,61 | v18,75 22,75 v22.25,75.25
  other vias: 16,49.85 9.95,61.51
CAN0_LOW  (via drill 0.3)
  Top 0.254: R2.1 10.6,48.5
  Top 0.305: 10.6,48.5 10,48.5 9.75,48.75 9.75,55 13,58.25 v13,61.5 13,62 15,64 v16,64 | J1.29 24.75,88.23 24.75,65.75 v23,64
  Bottom 0.254: L1.2 11,49.53 R2.1
  Bottom 0.305: v16,64 v23,64
  Bottom 0.406: D2.2 13,61.66 v13,61.5
  other vias: 11,48.1
CAN0_RXD  (via drill 0.3)
  Top 0.254: 23.5,44 23.5,44.25 v23.25,44.5
  Top 0.305: v32.25,33.25 28,33.25 25,36.25 25,41 23.5,42.5 23.5,44
  Bottom 0.254: U2.4 18,49.91 | U1.31 33.25,32.25 v32.25,33.25
  Bottom 0.305: v23.25,44.5 23.25,44.75 21,47 18.5,47 18.09,47.41 U2.4
CAN0_TXD  (via drill 0.3)
  Top 0.305: v24,40.5 24,36 27.5,32.5 v32.25,32.5
  Bottom 0.254: U1.30 33,31.75 v32.25,32.5
  Bottom 0.305: v24,40.5 24,47 22,49 22,49.76 U2.1
DAP0  (via drill 0.3)
  Top 0.254: 44,84 44,84.1
  Top 0.305: 47.5,43 v52,43 | 47.5,43 47.5,64.5 52,69 52,74 50.2,75.8 50.2,77.8 44,84 | 44,84.1 J1.11 | 47.5,43 39,43 38,42 38,37.5 v39,36.5
  Bottom 0.254: 61.7,34.5 CON1.4 | U1.37 39.25,36.25 v39,36.5
  Bottom 0.305: v52,43 54.25,43 58,39.25 58,35 58.5,34.5 61.7,34.5
DAP1  (via drill 0.3)
  Top 0.305: v61,35.75 61,39 62,40 62,47 55,54 55,74 52.75,76.25 52.75,79.75 v52.5,80 | v46,80 42,84 J1.13
  Bottom 0.254: 63.75,27 56.75,19.5 55.75,18.5 43,18.5 42.5,19 42.5,19.75 42.75,20 U1.5
  Bottom 0.305: v61,35.75 CON1.2 63.31,35.79 63.75,35.35 63.75,27 | v52.5,80 v46,80
DD_5  (via drill 0.3)
  Top 0.305: v30.75,38.25 31,38 33.25,38 34.75,39.5 34.75,42 36.5,43.75 v46.5,43.75
  Bottom 0.254: IC4.14 29.23,39.77 v30.75,38.25 | v46.5,43.75 46.5,38.7 43.75,35.95 U1.46
DD_PIN3  (via drill 0.3)
  Top 0.254: v45,45 45,45.4 45.3,45.7 45.3,63.7 v45.4,63.8 | J1.1 54,88 64,78 v64,64 | v37.1,30.6 36.11,30.6 T3.3
  Bottom 0.254: v45,45 45,39 42.75,36.75 U1.44 42.75,33.75 41.5,32.5 37.9,32.5 37.5,32.1 37.5,31 v37.1,30.6 | v64,64 45.6,64 v45.4,63.8
DD_PIN4  (via drill 0.3)
  Top 0.254: v45.9,44.9 45.9,62.9 v46,63 | J1.3 52,89 63,78 v63,63
  Bottom 0.254: U1.45 43.25,36.15 45.9,38.8 v45.9,44.9 | v46,63 v63,63
DD_PIN5  (via drill 0.3)
  Top 0.305: v29.23,49.73 29.23,62.23 v31,64 | v62,65 62,77 62,77.48 J1.5
  Bottom 0.305: IC4.7 v29.23,49.73 | v62,65 32,65 v31,64
DIG0  (via drill 0.3)
  Top 0.305: v46.75,56 v46.75,50.25 | v32,60 v32,74
  Route2 0.305: v32,74 32,75.5 32.5,76 32.5,87.5 33,88 33,90.48 J1.24
  Bottom 0.305: IC5.2 46.75,50.01 v46.75,50.25 | v46.75,56 36,56 v32,60
DIG1  (via drill 0.3)
  Top 0.305: v35.25,50.25 35.25,60.5 33,62.75 33,74.9 32.5,75.4 32.5,86.75 31,88.25 31,90.48 J1.26
  Bottom 0.305: IC5.11 35.28,50.22 v35.25,50.25
DIG2  (via drill 0.3)
  Top 0.305: v41.75,50.25 41.75,55.75 43,57 43,59 39,63 39,75 37.5,76.5 37.5,78.75 36,80.25 v36,87.5 | v29,87.25 29,90.5 28.02,91.48 J1.28
  Bottom 0.305: IC5.6 41.63,50.13 v41.75,50.25 | v36,87.5 35.75,87.25 v29,87.25
EEDATA
  Bottom 0.254: IC1.2 15.75,27.75 14.05,26.05 R24.1 13.05,26
EN_PB_1  (via drill 0.3)
  Top 0.305: v49,49 R6.2
  Route2 0.254: v44.75,31 44.75,25.75 44.25,25.25 38,25.25 37,26.25 v37,28.75
  Bottom 0.254: 50.25,46.3 IC3.1 | v37,28.75 36.5,29.25 U1.25
  Bottom 0.305: 50.25,46.3 50.25,43 47,39.75 47,37 45.25,35.25 45.25,33.5 44.75,33 v44.75,31 | IC3.1 50.33,47.67 v49,49
EN_PB_2  (via drill 0.3)
  Top 0.254: R10.2 24.75,44.25 24.5,44.5
  Bottom 0.254: 26,45.75 33.25,45.75 35.5,43.5 35.5,34 36.55,32.95 40.85,32.95 41.75,33.75 U1.42 | IC4.1 25.32,46.42 26,45.75 | 25.32,44.48 R10.2 26,45.15 26,45.75
  other vias: 25.1,44.25
ENC_1
  Bottom 0.254: U1.19 31.25,26.25 28.25,29.25 28.25,37 26.62,38.62 IC4.18
ENC_2
  Bottom 0.254: IC4.17 27.25,40.6 27.25,38.75 28.75,37.25 28.75,29.5 31.5,26.75 U1.20
ENC_4
  Bottom 0.254: U1.21 31.75,27.25 29.25,29.75 29.25,37.75 27.93,39.08 IC4.16
ENC_8
  Bottom 0.254: IC4.15 28.57,39.42 29.75,38.25 29.75,30.25 32.25,27.75 U1.22
ENCODER_1  (via drill 0.3)
  Top 0.305: v19,60.5 v19,69 | v26.62,49.88 v26.62,60.38 | v13,69 12,70 12,88 15.48,91.48 J1.40
  Bottom 0.305: IC4.3 v26.62,49.88 | v19,69 v13,69 | v19,60.5 19.12,60.38 v26.62,60.38
ENCODER_2  (via drill 0.3)
  Top 0.305: v19.75,61.25 19.75,78 19,79 19,90.2 18,91.2 J1.38 | v27.27,48.98 v27.27,60.98
  Bottom 0.305: IC4.4 v27.27,48.98 | v19.75,61.25 20.02,60.98 v27.27,60.98
ENCODER_4  (via drill 0.3)
  Top 0.305: v20.5,61.75 v20.5,72.5 | J1.37 18,79 17.25,78 v17.25,72.5 | v27.93,49.92 v27.93,61.58
  Bottom 0.305: IC4.5 v27.93,49.92 | v20.5,72.5 v17.25,72.5 | v20.5,61.75 20.68,61.58 v27.93,61.58
ENCODER_8  (via drill 0.3)
  Top 0.305: v21.25,62.25 v21.25,74 | v16,74 14.75,75.25 14.75,88.25 J1.39 | v28.57,48.92 v28.57,62.17
  Bottom 0.305: IC4.6 v28.57,48.92 | v21.25,74 v16,74 | v21.25,62.25 21.32,62.17 v28.57,62.17
GND  (via drill 0.3, 3.2)
  Top 0.254: C26.1 39.25,21.5 39.5,21.75 | C14.1 16.75,30.3 | C8.1 35.25,35 | C7.1 30.6,36.9 | 29.5,42.05 C5.1 | C6.1 36.25,41.75 36.4,41.9 | 16.7,34 C10.2 19.7,34.05 v20.75,33
  Top 0.305: C8.1 36.15,33.95 C12.1 36.15,31.85 v36.5,31.5 | 35.25,35 36.5,36.25 v36.75,36.25 | R17.1 R18.1 43.65,33.25 v43.5,33.25 | C11.2 C7.1 | 30.6,36.9 29.5,38 29.5,42.05 | v22,55.5 22,51.5 20.64,50.13 U2.2 | C3.2 44.2,46.55 44.25,46.5 | C1.2 21,81.5 | C1.2 21,81.75 | C1.2 21,88.48 J1.33 | C20.1 54.65,24.75 C22.1 | v47.25,33.25 47.25,33.15 C13.1 | 16.75,30.3 16.25,30.8 | 36.4,41.9 36.4,42.4 36.75,42.75 v37.25,42.75 | C2.2 14.95,56.1 D2.1 | C14.1 16.7,34
  Bottom 0.254: 44.75,22.5 U1.1 | U1.13 38.75,21.85 C26.1 | U1.17 31.05,25.25 C32.1 | 24,32.75 IC1.25 21,32.75 v20.75,33 IC1.18 | v36.75,36.25 37.25,35.75 U1.33 | R33.2 39.1,44.65 | v37.75,46 37.83,46.08 | IC1.47 18.75,26.75 19,27 19.5,27 19.75,26.75 IC1.45 | IC1.34 23.05,28.25 C15.2
  Bottom 0.305: 39.1,44.65 v37.75,46 | 37.83,46.08 IC5.9 | D2.1 15,61.46 15,61 | v22,55.5 U2.8 | U2.2 20.75,49.88 | R32.2 42.75,45.55 C3.2 | IC4.10 v31.18,49.17 | R37.1 23.6,86.65 24,86.25 | IC3.10 56.17,44.88 C4.1 | v44.75,21.75 44.75,22.5 | C34.2 54.65,27.15 C20.1 | U1.49 47.25,33.05 v47.25,33.25
  other vias: 39.25,21.35 22.5,28.8 41,29 29.75,42.25 14.95,61.51 20.64,50 44.2,47 23.5,86.65 58,43.05 54.65,26
  pour Route3: -4,103 75,103 75,-6 -4,-6
  pour Top: -6,106 79,106 79,-10 -7,-10 -7,106
  pour Bottom: -2,101 -2,-3 72,-3 72,101
LVPD_SUP
  Bottom 0.61: J1.35 17,86.48 17,83 | T1.TAB 17,83 | 17,83 T1.2
MINUS  (via drill 0.3)
  Top 0.305: v2.75,51.75 3,52 3,85 v11,93
  Bottom 0.305: IC3.5 52.92,48.42 54,49.5 54,51 53.25,51.75 v2.75,51.75 | J1.34 22,92 20,94 15,94 14,93 v11,93
N$1
  Bottom 0.305: C31.1 50.1,21.25 Q2.1 50.1,24.1 51,25 51,26 50.25,26.75 U1.61
N$2
  Bottom 0.305: C34.1 53.2,29.25 Q2.3 53,28.85 53,27.5 52.75,27.25 U1.60
N$3  (via drill 0.3)
  Top 0.254: C14.2 14.8,30.55 15,30.75
  Bottom 0.254: IC1.6 15.3,29.75 C14.2
  other vias: 14.8,30.25
N$4  (via drill 0.3)
  Bottom 0.254: U1.3 43.75,21.25 44,21 R22.1
  other vias: 48.65,21
N$5  (via drill 0.3)
  Top 0.305: R39.1 29.75,48.75 v30,49
  Bottom 0.305: v30,49 29.88,48.88 IC4.8
N$6  (via drill 0.3)
  Top 0.254: C17.1 48.15,29 48,29
  Top 0.305: C19.1 C16.1
  Route2 0.254: v39.75,33.5 37.25,33.5 C16.1
  Bottom 0.254: C17.1 U1.57 46,28.75 44.75,27.5 44.75,25.5 44.5,25.25 37.5,25.25 36.5,26.25 36.5,28.25 36,28.75 U1.24 C16.1 | U1.41 41.25,34 40.75,33.5 v39.75,33.5
  other vias: 48.4,28.75 32.5,28.75
N$7  (via drill 0.3)
  Top 0.254: R21.1 49.15,23.35 v48.5,24
  Top 0.305: C22.2 49.9,23.75 R21.1
  Bottom 0.254: U1.63 48.25,25.75 48.5,25.5 v48.5,24
N$8
  Bottom 0.305: DISPLAY.P$8 27.25,75.28 R34.2
N$9  (via drill 0.3)
  Top 0.254: v41.25,21.5 41.35,21.65 C28.1 41.25,21.35 41.2,21.3 41.2,20.7 41,20.5 40.4,20.5 C29.1
  Bottom 0.254: U1.6 42.25,22 41.75,21.5 v41.25,21.5
N$10
  Bottom 0.305: R35.2 25.1,75.67 DISPLAY.P$7
N$11
  Bottom 0.254: 14,33 R29.2 14.95,33.05 15.4,32.6 15.4,31.3 15.95,30.75 IC1.8 | 14,32.75 14.25,32.75
  Bottom 0.305: 14,32.75 R29.2
N$12
  Bottom 0.254: IC1.7 15.75,30.25 14.25,31.75 13,31.75 11.95,32.8 | 11,31 11,30.7 R27.1
  Bottom 0.305: 11.95,32.8 R28.2 11.75,31.75 11,31
N$13
  Bottom 0.305: R36.2 23,75 23.6,75.6 23.6,76.65 DISPLAY.P$6
N$14
  Bottom 0.254: IC1.5 14.95,29.25 13.7,30.5 R27.2
N$15  (via drill 0.3)
  Top 0.254: 19.45,24 19.45,24.5 R20.1 19.5,24.05 19.45,24
  Top 0.305: C27.2 19.45,24
  Bottom 0.254: IC1.46 19.25,24.8 R20.1
  other vias: 19.5,24.55
N$16
  Bottom 0.254: U2.7 20.64,56.12 | L1.4 13.27,56.98
  Bottom 0.305: U2.7 20.64,54.63 20,54 17.5,54 13.27,56.98
N$17
  Bottom 0.254: 19.25,55.38 U2.6 19.36,54.87
  Bottom 0.305: U2.6 19.36,55.88 18.25,57 15.75,57 14.75,58 14.75,59.25 14.5,59.5 10.9,59.5 10.8,59.4 10.8,57.77 L1.1
N$18
  Bottom 0.254: R31.1 24.5,35.55 24.45,35.6 23.9,35.6 23.75,35.45 IC1.24
N$19
  Bottom 0.254: R30.1 22.75,36.75 23.25,36.25 IC1.23
N$20
  Bottom 0.254: IC1.43 20.75,21.25 21.3,20.7 Q1.2 27.1,20.7 C32.2
N$21
  Bottom 0.254: C33.2 Q1.1 19.7,20.7 20.25,21.25 IC1.44
N$22  (via drill 0.3)
  Top 0.305: v18.25,58.5 18.09,58.34 U2.5
  Bottom 0.254: U2.5 18.26,55.67
  Bottom 0.305: JP1.1 18.25,58.74 v18.25,58.5 18.25,58.25 | U2.5 18,55.41 18,55
  other vias: 18.09,55.5
N$23
  Bottom 0.305: L3.2 37.6,83.6 38,84
  Bottom 0.61: 38,84 38.91,84.91 IC6.8 IC6.7 | L3.2 37.6,80.65 40,79.25 40,75.54 39,74.54 39,73 | 39,73 38.54,72.54 C38.+ 30.5,72.54 C39.2 | 39,73 47.34,73 C37.+
N$24  (via drill 0.3)
  Bottom 0.254: R12.1 LED1.C
  other vias: 41.35,40.5
N$25  (via drill 0.3)
  Top 0.305: R4.2 39.25,56 v40.5,57.25
  Bottom 0.254: 40.5,59.89 IC5.18
  Bottom 0.305: v40.5,57.25 40.5,59.89
N$26
  Bottom 0.254: LED2.C R33.1
N$27  (via drill 0.3)
  Top 0.254: v42.25,37.25 42.25,37.15
  Top 0.305: 42.25,37.15 R18.2
  Bottom 0.254: U1.43 v42.25,37.25 42.75,37.75 LED3.A
N$28  (via drill 0.3)
  Top 0.254: R13.1 8.35,38.4 8,38.75
  Bottom 0.305: R13.1 8.54,38.44 IC2.1 IC2.2 9.29,39.71 8.75,40.25 8.75,42 9,42.25 IC2.4 IC2.5
  other vias: 8.25,38.6
N$29  (via drill 0.3)
  Top 0.254: R3.1 25.1,49.9 24.75,50.25
  Bottom 0.254: IC4.2 25.98,49.17 R3.1
  other vias: 25.25,49.9
N$30
  Bottom 0.305: 57.3,85.4 R38.2
  Bottom 0.61: C43.1 57.3,85.4
N$31  (via drill 0.3)
  Top 0.305: v31,50 R40.1
  Bottom 0.305: IC4.9 30.52,49.52 v31,50
N$32
  Bottom 0.254: R32.1 LED3.C
N$33  (via drill 0.3)
  Top 0.305: R7.2 v51,49
  Bottom 0.305: IC3.2 50.98,48.98 v51,49
N$34
  Bottom 0.61: 20.35,85 T1.1 22.55,85.3 R37.2 D4.A
N$35  (via drill 0.3)
  Top 0.305: v32,43 32.9,43 R11.1
  Bottom 0.305: IC4.11 31.18,42.17 v32,43
N$36
  Bottom 0.61: IC6.3 54.52,82.36 C43.2
N$37
  Bottom 0.61: IC6.6 44.28,82.36 C42.2 43.35,83 41,83 40.5,82.5 40.5,80.5 42,79 58,79 59,80 61,80 61.1,79.9 L2.2 63,77 65,75 65,61 63.2,59.2 D1.C
N$38
  Bottom 0.61: C42.1 43.74,81.09 IC6.5
N$39  (via drill 0.3)
  Top 0.305: v16.75,58.75 16.75,58.25 16,57.5 R1.2 C2.1 11.55,52.15 11,51.6 R2.2
  Bottom 0.254: v16.75,58.75 JP1.2
N$45  (via drill 0.3)
  Top 0.305: v52,50 52,48.65 53,47.65 R8.1
  Bottom 0.305: IC3.3 51.62,49.62 v52,50
N$46  (via drill 0.3)
  Top 0.305: 53,49.65 v53,50 53,48.65 R9.1
  Bottom 0.305: IC3.4 52.27,49.27 v53,50
PLUS  (via drill 0.3)
  Top 0.305: v60,53 60,64 57,67 57,75 58,76 58,79 50,87 48.5,87 47,88.5 47,90.48 J1.10
  Bottom 0.305: IC3.9 55.52,48.02 60,52.5 v60,53
POTI_1  (via drill 0.3)
  Top 0.305: v61,18 61,26 63,28 63,61 61,63 61,77.25 50.25,88 49.25,88 | 49.25,88 49,88 48,89 J1.7 | 49.25,88 50,88
  Bottom 0.305: U1.14 38.25,20.75 41,18 v61,18
RXD_DISP  (via drill 0.3)
  Top 0.305: v31,75.2 31,66 24,59 24,51 23,50 23,46 21,44 v21,42.25 v21,39
  Bottom 0.254: 24,37.95 24,38 24,38.25 23.25,39 v21,39
  Bottom 0.305: IC2.11 v21,42.25 | R31.2 24.45,38 24,38 | v31,75.2 32.25,75.2 DISPLAY.P$10
SEG_A  (via drill 0.3)
  Top 0.305: v35.28,61.72 34,63 34,75 35,76 35,92 36,93 41,93 42,92 J1.14
  Bottom 0.305: IC5.14 v35.28,61.72
SEG_B  (via drill 0.3)
  Top 0.305: v40,72 40,64 v42,62
  Route2 0.305: J1.16 39,90.48 39,80 40,79 v40,72
  Bottom 0.305: IC5.16 37.83,61.42 v37.75,61.5 38.25,62 v42,62
SEG_C  (via drill 0.3)
  Top 0.305: v43,61.5 43,65.25 41,67.25 v41,72
  Route2 0.305: J1.18 38,92 39,93 42,93 43,92 43,78.5 42.75,78.25 42.75,73.25 v44,72
  Bottom 0.305: IC5.20 42.91,61.41 v43,61.5 | v41,72 v44,72
SEG_D  (via drill 0.3)
  Top 0.305: v46.75,61.5 46.75,64 42.75,68 42.75,78.75 37,84.5 37,90 36,91 J1.20
  Bottom 0.305: IC5.23 46.75,60.06 v46.75,61.5
SEG_E  (via drill 0.3)
  Top 0.305: v44.25,61.5 44.25,65.25 42,67.5 v42,70
  Route2 0.305: v36,70 35,71 35,90.5 34.98,90.5 J1.22
  Bottom 0.305: IC5.21 44.17,61.42 v44.25,61.5 | v42,70 v36,70
SH_DN
  Bottom 0.254: IC3.15 53.58,35.33 49.75,31.5 48.25,31.5 48,31.25 U1.52
SH_UP
  Bottom 0.254: IC3.13 54.88,34.62 50.75,30.5 49,30.5 48.25,29.75 U1.55
SHIFT_DOWN  (via drill 0.3)
  Top 0.305: v4,52.5 4,84.5 v10,90.5
  Bottom 0.305: IC3.6 53.58,48.33 55,49.75 55,51 53.5,52.5 v4,52.5 | J1.36 19.73,91.48 18.75,90.5 v10,90.5
SHIFT_UP  (via drill 0.3)
  Top 0.305: v59,53 59,64 56,67 56,75.25 55.5,75.75 55.5,80.5 50,86 48,86 46,88 J1.9
  Bottom 0.305: IC3.8 54.88,48.12 59,52.25 v59,53
STATUS_0  (via drill 0.3)
  Top 0.254: 39.75,34.9 R16.2
  Top 0.305: v39.75,37 39.75,34.9
  Bottom 0.254: U1.38 v39.75,37
STATUS_1  (via drill 0.3)
  Top 0.254: v39.75,38.5 39.85,38.6 R15.2
  Bottom 0.254: LED2.A 39.8,38.45 R15.2 | LED2.A 39.75,38.25 | LED2.A v39.75,38.5 | U1.39 40.25,36.5 40.5,36.75 40.5,37 39.75,37.75 LED2.A
STATUS_2  (via drill 0.3)
  Top 0.254: R17.2 41.75,36.25 | R17.2 41.5,35.9 | 41.4,36 R17.2 | 41.4,36 41.25,36.15 | 41.4,36 42,36 41.8,36.2
  Top 0.305: 41.8,36.2 41.8,36.6 41.25,37.15 v41.25,37.25
  Bottom 0.254: LED1.A v41.25,37.25 41.25,36.75 40.75,36.25 U1.40
SUP6.1
  Bottom 0.61: 24,79.05 D4.C | L3.1 32.8,82.4 C41.2 27.6,82.4 D5.C 26.4,81.2 26.4,79.4 26.05,79.05 24,79.05 | T1.3 19.9,79.1 20,79 23.95,79 24,79.05
TOP_LEFT  (via drill 0.3)
  Top 0.305: v5,53.25 5,84 v16,95
  Bottom 0.305: IC3.7 54.23,48.23 56,50 56,51 53.75,53.25 v5,53.25 | J1.32 24,93 22,95 v16,95
TXD_DISP  (via drill 0.3)
  Top 0.305: v28,64 23,59 23,51.5 22,50.5 22,47 v20,45 v20,37 | v35,66 35,74 36.27,75.27 DISPLAY.P$11
  Bottom 0.254: 16.53,44.75 IC2.9 16.78,45 | R30.2 20,36.95 v20,37
  Bottom 0.305: v28,64 30,64 32,66 v35,66 | v20,45 16.78,45
U0C0_RXD  (via drill 0.3)
  Top 0.305: v32.25,31.75 27.25,31.75 23,36 v23,41
  Bottom 0.254: U1.29 32.75,31.25 v32.25,31.75
  Bottom 0.305: v23,41 23,43.75 20.69,46.06 IC2.8
U0C0_TXD  (via drill 0.3)
  Top 0.305: v32.25,31 27,31 22,36 v22,41
  Bottom 0.254: 21.98,40.98 v22,41 | U1.28 32.5,30.75 v32.25,31
  Bottom 0.305: IC2.12 21.98,40.98
U0C1_CLK  (via drill 0.3)
  Top 0.305: v32.75,47 32.75,56.75 34,58 34,60.01 IC5.13
  Bottom 0.254: v32.75,47 34.25,45.5 36,43.75 36,34.25 36.75,33.5 38.5,33.5 38.75,33.75 U1.36
  Bottom 0.305: 34,60.01 IC5.13 34.02,60.48 34,60.5
  other vias: 34.02,60.03
U0C1_TXD  (via drill 0.3)
  Top 0.305: v45.5,27.25 49.25,27.25 56.5,34.5 56.5,41 56.25,41.25 48.75,41.25 v48,42
  Bottom 0.254: v48,42 48,49.96 IC5.1 | v45.5,27.25 46,27.75 U1.59
USB_2  (via drill 0.3)
  Top 0.305: v14,35.25 14,41 20,47 20,50.5 21,51.5 21,58 29,66 29,74 30,75 J1.25
  Bottom 0.254: R29.1 v14,35.25
USB_3  (via drill 0.3)
  Top 0.305: v11.75,35 11.75,35.75 13,37 13,41.5 18.5,47 18.5,50 20.25,51.75 20.25,58.25 v26,64
  Route2 0.305: J1.23 30,87.48 30,77 v30,68
  Bottom 0.254: R28.1 v11.75,35
  Bottom 0.305: v26,64 29,67 v30,68
USB_PWR  (via drill 0.3)
  Top 0.305: v18.25,43.5 v18.25,39.75 17.75,39.75 15,37 15,33 10.75,28.75 R25.1
  Bottom 0.254: 11,28.2 R25.1 10.75,28.75 11,29 14,29 14.25,28.75 IC1.4 | 16.61,39.75 IC2.13 | 16.59,43.5 IC2.10
  Bottom 0.305: v18.25,39.75 16.61,39.75 | v18.25,43.5 16.59,43.5 | R26.2 R25.1
  other vias: 10.75,27.95
USB_VDD  (via drill 0.3)
  Top 0.305: v8,26 8,34 12,38 12,42 17.5,47.5 17.5,50 19.5,52 19.5,58.5 27.25,66.25 27.25,88.73 J1.27
  Bottom 0.254: v8,26 R25.2

## Text on the board
tNames: Johannes Steininger, Alexander Ulasik | Steering Wheel 2013